# Altium PCB v0.0.PcbDoc
Units mil, origin at the board's own origin, x right, y up, seen from the top; angles counter-clockwise.
Board outline 1136.52 x 984.25 mil, 4 copper layers (Top Layer, Gnd, Signal, Bottom Layer), stack 23.756 mil thick; 32 components, 25 nets, 108 pads, 35 vias.
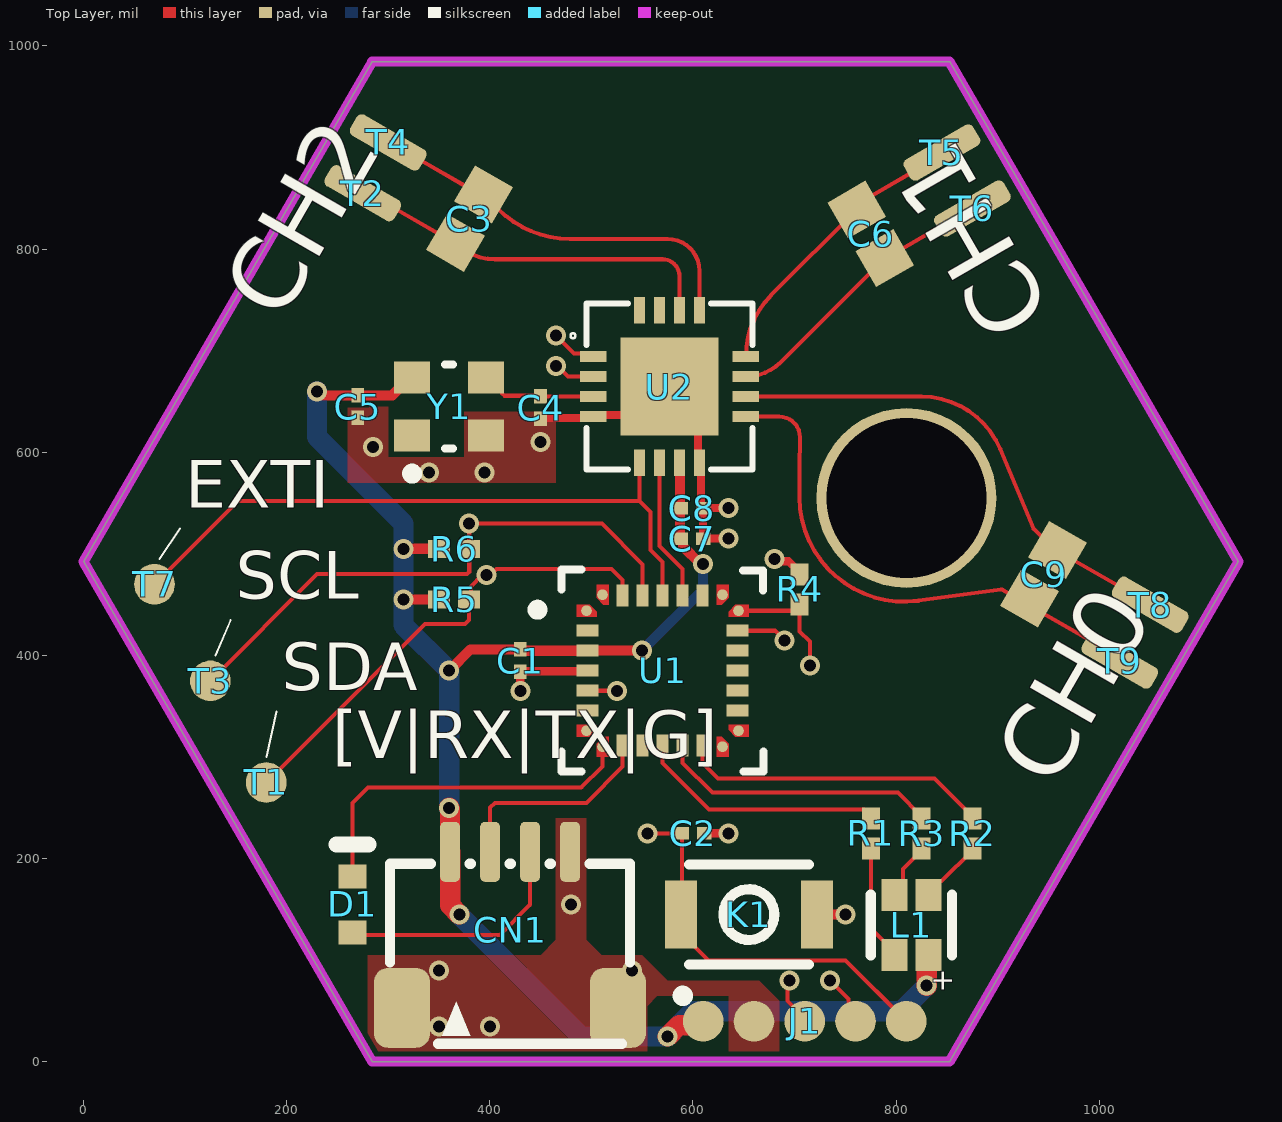
[diagram p0: Top Layer view]
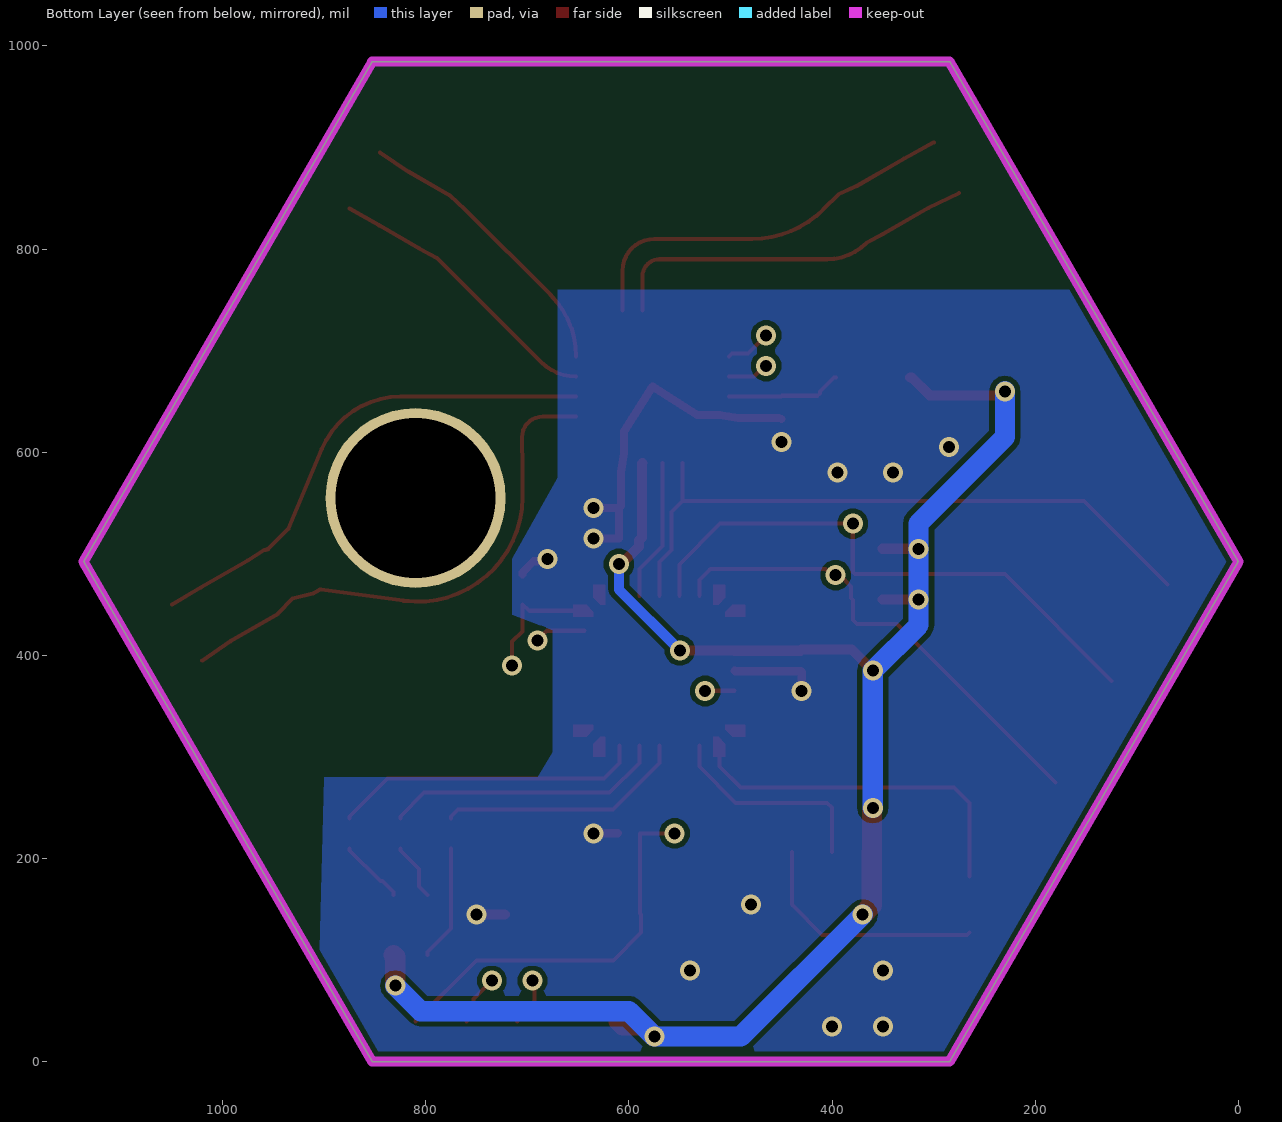
[diagram p1: Bottom Layer view, seen from below]
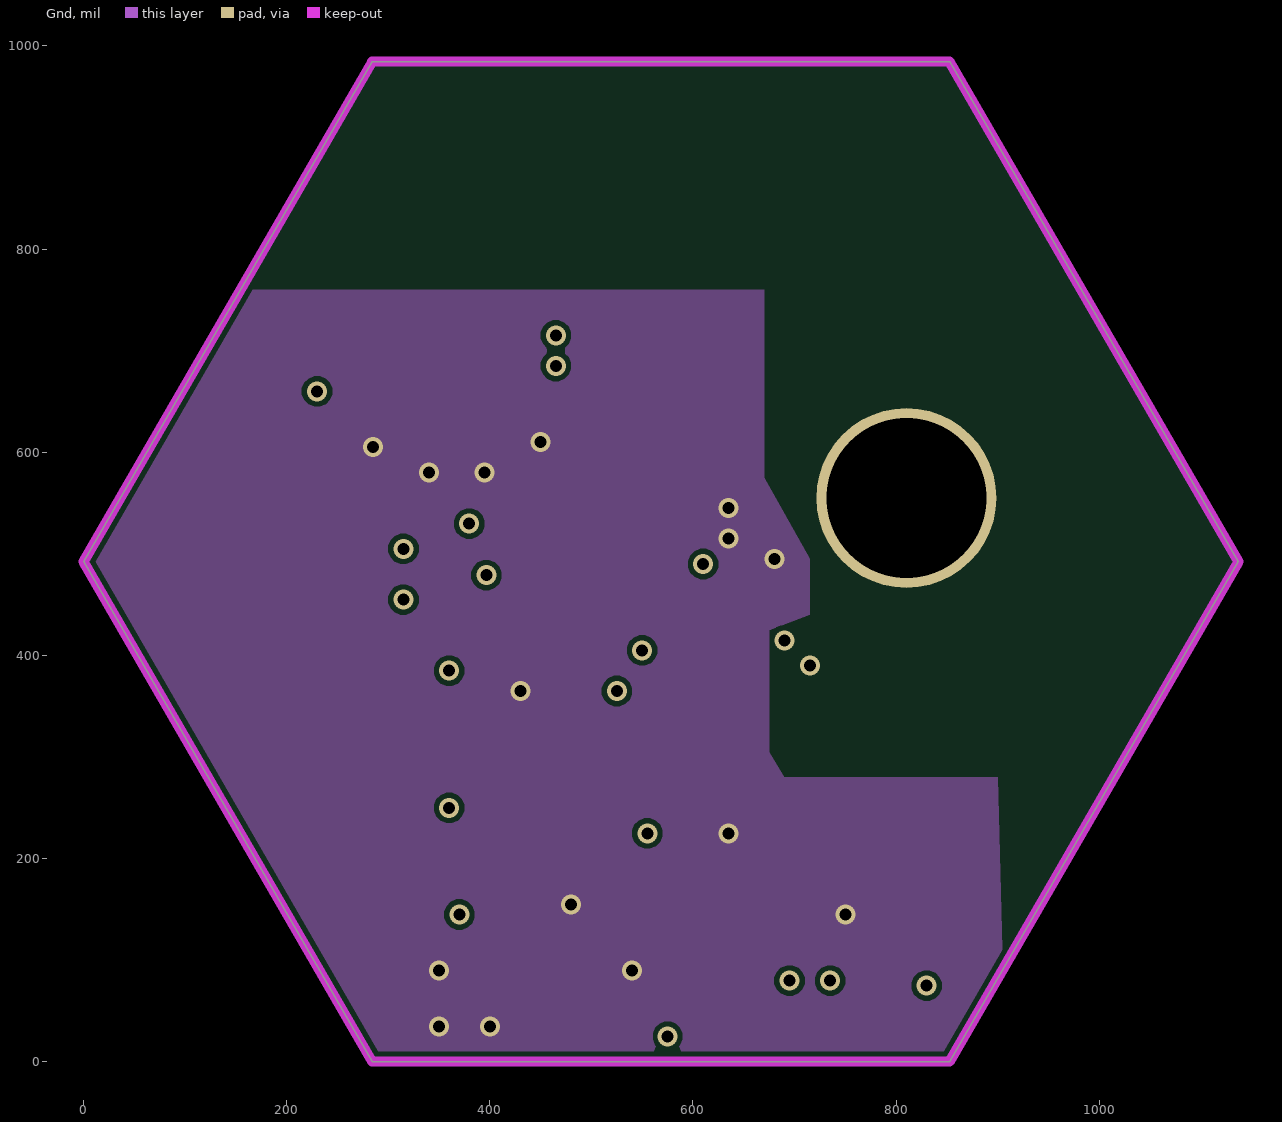
[diagram p2: Gnd]
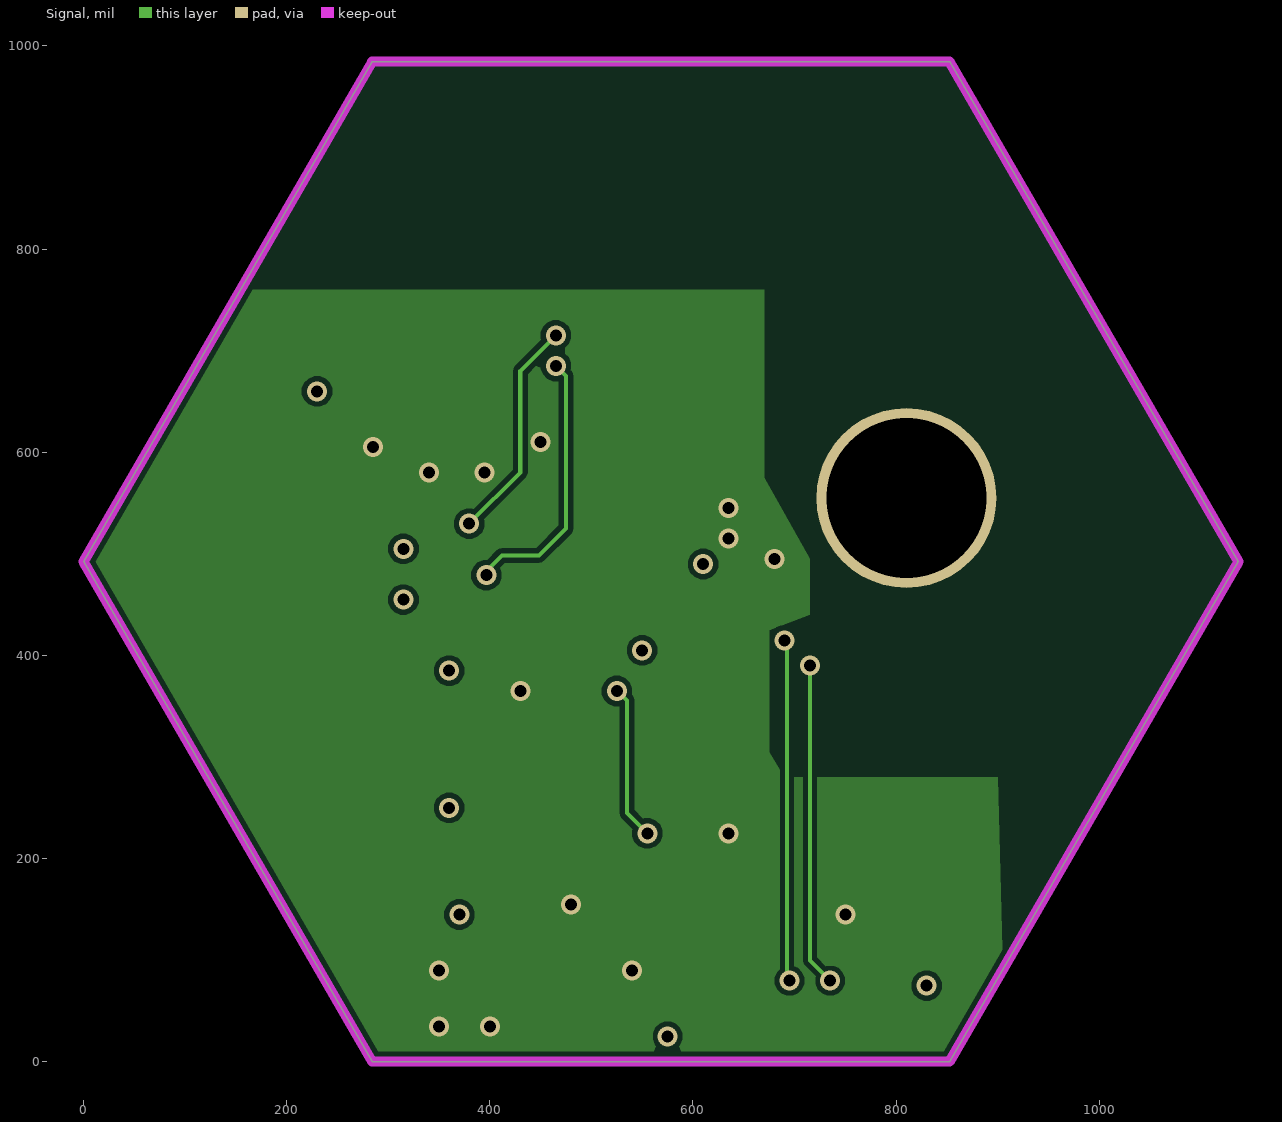
[diagram p3: Signal]

## Layer stack, top to bottom
Top Solder: solder mask 0.4, Solder Resist, Dk 3.5
Top Layer: signal copper 1.4
Dielectric 2: prepreg 2.8, PP-006, Dk 4.1
Gnd: signal copper 1.378
Dielectric 1: dielectric 12.6, FR-4, Dk 4.8
Signal: signal copper 1.378
Dielectric 3: prepreg 2.8, PP-006, Dk 4.1
Bottom Layer: signal copper 1.4
Bottom Solder: solder mask 0.4, Solder Resist, Dk 3.5

## Board outline
284.38,0.25 0.25,492.38 284.38,984.5 852.64,984.5 1136.77,492.38 852.64,0.25

## Design rules (kind name [scope] priority, off if disabled: settings)
Clearance [All] p1: gap=5 ignorepadtopadclearanceinfootprint=FALSE
PlaneConnect [All] p1: planeconnectstyle=Direct reliefexpansion=20 reliefentries=4 reliefconductorwidth=10 reliefairgap=10
PolygonConnect [All] p1: connectstyle=Direct reliefconductorwidth=10 reliefentries=4 polygonreliefangle="90 Angle" airgapwidth=10
RoutingVias [All] p1: holewidth=11.81 width=19.68 viastyle="Through Hole" minholewidth=11.81 minwidth=19.68 maxholewidth=11.81 maxwidth=19.68
SolderMaskExpansion [All] p1: expansion=4 istentingtop=FALSE
Width [All] p1: maxlimit=25 minlimit=4 preferedwidth=4
29 further rules are at their usual default settings.

## Components (designator, comment, footprint, x,y, rotation, side; value= is the part's Value field where it differs from the comment)
C1 "100nF" CAPC0201(0603)33_L 430,395 r270 top value=10nF
C2 "100nF" CAPC0201(0603)33_L 600,225 r0 top value=10nF
C3 "330pF" CAPC1608X95X40ML15T15 380,830 r240 top
C4 "15pF" CAPC0201(0603)33_L 450,643.98 r90 top value=10nF
C5 "100nF" CAPC0201(0603)33_L 270,645 r90 top value=10nF
C6 "330pF" CAPC1608X95X40ML15T15 775,815 r120 top
C7 "100nF" CAPC0201(0603)33_L 598.98,515 r0 top value=10nF
C8 "10nF" CAPC0201(0603)33_L 598.98,545 r0 top
C9 "330pF" CAPC1608X95X40ML15T15 945,480 r60 top
CN1 "UART-IN" CONN-SMD_4P-P1.00_WF10004-01200 420,130 r0 top
D1 "RB521S-30" DIOD-SOD523-2_V 265,155 r90 top
J1 "DEBUG-SWD-HEADER" DEBUG-SWD-HEADER-Footprint-1 610,40 r0 top
K1 "Button" SW-SMD_ST-1185X 655,145 r0 top
L1 "RGB-LED-1615" RGB-LED-1615-Footprint-1 815,135 r270 top
R1 "500R" RESC0603X26X15ML03T05 775,225 r90 top
R2 "500R" RESC0603X26X15ML03T05 875,225 r90 top
R3 "500R" RESC0603X26X15ML03T05 825,225 r90 top
R4 "10K" RESC0603X26X15ML03T05 705,465 r270 top
R5 "4.7K" RESC0603X26X15ML03T05 365,455 r0 top
R6 "4.7K" RESC0603X26X15ML03T05 365,505 r0 top
T1 "TP" TestPoint 180,275 r0 top
T2 "TP" TESTPOINT-RECTANGLE-1.5X3#1 275,855 r60 top
T3 "TP" TestPoint 125,375 r0 top
T4 "TP" TESTPOINT-RECTANGLE-1.5X3#1 300,905 r60 top
T5 "TP" TESTPOINT-RECTANGLE-1.5X3#2 845,895 r270 top
T6 "TP" TESTPOINT-RECTANGLE-1.5X3#3 875,840 r180 top
T7 "TP" TestPoint 70,470 r0 top
T8 "TP" TESTPOINT-RECTANGLE-1.5X3#4 1050,450 r0 top
T9 "TP" TESTPOINT-RECTANGLE-1.5X3#4 1020,395 r0 top
U1 "STM32G031G8U6" FP-UFQFPN28-A0B0-MFG 570,385 r0 top
U2 "LDC1614RGHR" LDC1614RGHR-Footprint-1 576.88,664.73 r0 top
Y1 "OT252040MJBA4SL" FP-ECS-TXO-2520-MFG 360,645 r0 top

## Footprints (in the part's own frame and the unit in brackets; to place one, negate y for a bottom-side part, rotate by r counter-clockwise, add the part's x,y. Pads: shape width x height; smd on the part's side, far side on the other; paste and mask are expansions set on the pad)
CAPC0201(0603)33_L [mm] "Chip Capacitor, Body 0.6x0.3mm, Height 0.33mm, IPC High Density"
  rect 0.36x0.32 smd: 1(-0.28,0) 2(0.28,0)
  body extent -0.32,-0.17 0.32,0.17, height 0.33
CAPC1608X95X40ML15T15 [mm] "Chip Capacitor, 2-Leads, Body 1.60x0.80mm, IPC Low Density"
  rect 1.05x1.1 smd: 1(-0.7,0) 2(0.7,0)
  body extent -0.88,-0.48 0.87,0.47, height 0.95
CONN-SMD_4P-P1.00_WF10004-01200 [mm]
  rrect50% 0.5x1.5 smd mask+0.051: 1(-1.5,1.95) 2(-0.5,1.95) 3(0.5,1.95) 4(1.5,1.95)
  rrect50% 1.4x2 smd mask+0.051: 5(2.7,-1.95) 6(-2.7,-1.95)
  silkscreen extent -3,-2.85 3,1.65, body extent -2.95,-2.98 3.05,1.97, height 2.9
DEBUG-SWD-HEADER-Footprint-1 [mil]
  round 40 smd: 1(0,0) 2(50,0) 3(100,0) 4(150,0) 5(200,0)
  silkscreen extent -25,20 -15,30
DIOD-SOD523-2_V [mm] "SOD523, 2-Leads, Body 1.2x0.8mm"
  rect 0.6x0.7 smd: 1(-0.7,0) 2(0.7,0)
  silkscreen extent 1.5,-0.4 1.5,0.4, body extent -0.8,-0.4 0.8,0.4, height 0.65
FP-ECS-TXO-2520-MFG [mm]
  rect 0.9x0.8 smd paste+0 mask+0: 1(-0.925,-0.725) 2(0.925,-0.725) 3(0.925,0.725) 4(-0.925,0.725)
  silkscreen extent -1.05,-1.8 0.1,1.05, body extent -1.48,-1.22 1.48,1.22, height 0.25
FP-UFQFPN28-A0B0-MFG [mm]
  round 0.27 smd paste+0 mask+0: 1(-1.9,1.5) 7(-1.9,-1.5) 8(-1.5,-1.9) 14(1.5,-1.9) 15(1.9,-1.5) 21(1.9,1.5) 22(1.5,1.9) 28(-1.5,1.9)
  rect 0.55x0.3 smd paste+0 mask+0: 2(-1.875,1) 3(-1.875,0.5) 4(-1.875,0) 5(-1.875,-0.5) 6(-1.875,-1) 16(1.875,-1) 17(1.875,-0.5) 18(1.875,0) 19(1.875,0.5) 20(1.875,1)
  rect 0.3x0.55 smd paste+0 mask+0: 9(-1,-1.875) 10(-0.5,-1.875) 11(0,-1.875) 12(0.5,-1.875) 13(1,-1.875) 23(1,1.875) 24(0.5,1.875) 25(0,1.875) 26(-0.5,1.875) 27(-1,1.875)
  Top Layer region: -1.35,1.65 -1.48,1.65 -1.65,1.82 -1.65,2.15 -1.35,2.15 -1.35,1.65
  Top Layer region: 1.35,1.65 1.48,1.65 1.65,1.82 1.65,2.15 1.35,2.15 1.35,1.65
  Top Layer region: 1.35,-1.65 1.48,-1.65 1.65,-1.82 1.65,-2.15 1.35,-2.15 1.35,-1.65
  Top Layer region: -1.35,-1.65 -1.48,-1.65 -1.65,-1.82 -1.65,-2.15 -1.35,-2.15 -1.35,-1.65
  Top Layer region: -1.65,1.35 -1.65,1.48 -1.82,1.65 -2.15,1.65 -2.15,1.35 -1.65,1.35
  Top Layer region: 1.65,1.35 1.65,1.48 1.82,1.65 2.15,1.65 2.15,1.35 1.65,1.35
  Top Layer region: 1.65,-1.35 1.65,-1.48 1.82,-1.65 2.15,-1.65 2.15,-1.35 1.65,-1.35
  Top Layer region: -1.65,-1.35 -1.65,-1.48 -1.82,-1.65 -2.15,-1.65 -2.15,-1.35 -1.65,-1.35
  silkscreen extent -3.25,-2.52 2.52,2.53, body extent -2.25,-2.25 2.25,2.25, height 0.25
LDC1614RGHR-Footprint-1 [mm]
  rect 0.665x0.28 smd paste+0 mask+0.051: 1(-1.908,0.75) 2(-1.908,0.25) 3(-1.908,-0.25) 4(-1.908,-0.75) 9(1.908,-0.75) 10(1.908,-0.25) 11(1.908,0.25) 12(1.908,0.75)
  rect 0.28x0.665 smd paste+0 mask+0.051: 5(-0.75,-1.908) 6(-0.25,-1.908) 7(0.25,-1.908) 8(0.75,-1.908) 13(0.75,1.908) 14(0.25,1.908) 15(-0.25,1.908) 16(-0.75,1.908)
  rect 2.45x2.45 smd paste+0 mask+0.051: 17(0,0)
  silkscreen extent -2.47,-2.08 2.08,2.08, body extent -1.97,-1.97 2.03,2.03, height 0.8
RESC0603X26X15ML03T05 [mm] "Chip Resistor, 2-Leads, Body 0.60x0.30mm, IPC Low Density"
  rect 0.55x0.45 smd: 1(-0.375,0) 2(0.375,0)
  body extent -0.32,-0.16 0.32,0.17, height 0.26
RGB-LED-1615-Footprint-1 [mm]
  rect 0.8x0.65 smd paste+0 mask+0.05: 1(0.757,-0.425) 2(0.757,0.425) 3(-0.743,0.425) 4(-0.743,-0.425)
  silkscreen extent -0.75,-1.02 0.77,1.02, body extent -0.8,-0.8 0.8,0.8, height 0.35
SW-SMD_ST-1185X [mm]
  rect 0.8x1.7 smd paste+0 mask+0.051: 1(-1.7,0) 2(1.7,0)
  silkscreen extent -1.5,-1.25 1.5,1.25, body extent -2,-1.25 2,1.25, height 1.6
TestPoint [mil]
  round 40 smd: 1(0,0)
TESTPOINT-RECTANGLE-1.5X3#1 [mm]
  rrect50% 0.6x2 smd: 1(0,0)
TESTPOINT-RECTANGLE-1.5X3#2 [mm]
  rrect50% 0.6x2 smd rot 30: 1(0,0)
TESTPOINT-RECTANGLE-1.5X3#3 [mm]
  rrect50% 0.6x2 smd rot 120: 1(0,0)
TESTPOINT-RECTANGLE-1.5X3#4 [mm]
  rrect50% 0.6x2 smd rot 60: 1(0,0)

## Part data
C1 C2 C4 C5 C7 C8: library part CMP-1033-00642-1, "CAP 10nF 16V ±10% 0201 (0603 Metric) Thickness 0.33mm SMD", Case-EIA=0201, Case-Metric=0603, Rated Voltage="16 V", Tolerance=Â±10%, Max Thickness="0.33 mm", Technology=SMT
C3 C6 C9: library part CMP-2006-00057-1, Manufacturer=Vitramon, Part Number=VJ0603Y104KXXCW1BC
CN1: library part SH1.0-4P, "连接器", Current Rating (Max)=500mA, JLCPCB Part Class="Extended Part", LCSC Part Name="1mm 1x4P 卧贴", Manufacturer=ATOM(爱特姆), Manufacturer Part=WF10004-01200, Operating Temperature Range=-25℃~+85℃, Add into BOM=yes, Convert to PCB=yes, Datasheet=https://atta.szlcsc.com/upload/public/pdf/source/20200107/C479990_7EE1728C707014A64676B41D860FB4D7.pdf, Device=WF10004-01200, Gender=公型插针, Mounting Style=卧贴, Name=WF10004-01200, Number of PINs Per Row=4, Number of Rows=1, Pins Structure=1x4P, Pitch=1mm, Reference Series=-, Row Spacing=-, Supplier=LCSC, Supplier Footprint=SMD,P=1mm, Supplier Part=C479990, Symbol=WF10004-01200
D1: library part CMP-2000-05518-2, "Surface Mount Fast Switching Diode, -65 to 150 degC, 2-Pin SOD523, RoHS, Tape and Reel", Forward Current=250mA, Manufacturer="Diodes Inc", Package Description="2-Pin Small Outline Diode, Body 1.2 x 0.8 mm", Package Reference=SOD523-2, Package Type=SOD-523, PartNumber=1N4148WT, Datasheet URL=http://www.diodes.com/_files/datasheets/ds30396.pdf, Datasheet Version="Rev. 16-2, 11/2015", Diode Configuration=Single, Manufacturer URL=http://www.diodes.com/, Mounting Technology=SurfaceMount, Mounting Type=SurfaceMount, Number of Elements per Chip=1, Package URL=http://www.diodes.com/_files/packages/SOD523.pdf, Pin Count=2
J1: library part CMP-002-00074-1, "1.27MM 5P 测试/调试/下载焊点"
L1: library part CMP-007-00036-2, "RGB LED"
R1 R2 R3 R4 R5 R6: library part CMP-2004-01563-1, Manufacturer="KOA Speer", Part Number=RK73H1HTTC1002F
T1 T2 T3 T4 T5 T6 T7 T8 T9: library part TestPoint, "TestPoint"
U1: library part CMP-031-00013-1, "MCU 32-Bit ARM Cortex-M0+ RISC 64KB Flash 1.7V to 3.6V 28-Pin UFQFPN Tray", Case/Package=UFQFPN, Max Operating Temperature=85°C, Min Operating Temperature=-40°C, Mounting Technology="Surface Mount", Pins=28
U2: library part CMP-031-00006-3, "4-Ch, 28-bit, high-resolution Inductance to digital converter 16-WQFN -40 to 125", Max Operating Temperature=125°C, Min Operating Temperature=-40°C, Mounting Technology="Surface Mount", Pins=16, RoHS Compliant=Yes
Y1: library part CMP-40224-000034-1, "XTAL OSC TCXO 25.0000MHZ HCMOS", RoHS Compliant=Yes

## Free pads (board coordinates)
  round 177.17 hole 157.48: 1(810,555)

## Via types
v1: diameter 19.68, hole 11.81, Top Layer to Bottom Layer, tented both sides, 35 vias

## Nets (pads, with @x,y where several pads share a name; then routed paths per layer and width w, separated by ;. In a path a pad name is that pad's centre, name@x,y a point inside that pad or via, vN(x,y) a via of type N, cw(c..) or ccw(c..) an arc to the next point about the centre after c; other vN are vias at no path point)
3V3: C1.1 C5.2 C7.1 C8.1 CN1.1 J1.1 L1.2 R5.1 R6.1 U1.3 U2.7 Y1.4 | length 1769
  Top Layer w10: v1(230,660) 232.62,660 236.6,656.02 C5.2 304.09,656.02 321.61,673.54 Y1.4 ; v1(315,455) R5.1 ; v1(315,505) R6.1 ; v1(360,385) 381.02,406.02 C1.1 431.3,404.69 U1.3 496.34,404.84 549.84,404.84 v1(550,405) ; U2.7 587.23,589.11 587.23,515.72 588.02,515.72 590.04,513.7 590.04,507.43 607.47,490 v1(610,490)
  Top Layer w20: v1(360,250) 360.79,249.21 360.79,206.93 CN1.1 360.94,154.06 v1(370,145) ; v1(575,25) 586.17,36.17 606.17,36.17 J1.1 ; v1(830,75) 830,103.46 L1.2
  Bottom Layer w10: v1(550,405) 610,465 v1(610,490)
  Bottom Layer w20: v1(230,660) 230,615 315,530 315,430 v1(360,385) v1(360,250) ; v1(370,145) 490,25 v1(575,25) 600,50 805,50 v1(830,75)
CH0-A: C9.1 T9.1 U2.9 | length 519.7
  Top Layer w4: U2.9 684.8,635.2 cw(c684.8,614.64) 705.36,614.8 cw(c701.36,614.77) 705.36,614.74 704.8,583.7 704.8,555.23 ccw(c808.01,556.19) 821.8,453.9 cw(c822.38,449.94) 821.87,453.91 903.03,464.83 904.37,464.83 905.3,464.3 911.25,460.86 C9.1 945.3,441.21 992.35,414.04 T9.1
CH0-B: C9.2 T8.1 U2.10 | length 494.4
  Top Layer w4: U2.10 824.89,654.89 cw(c824.46,570.37) 902.4,603.07 935.4,524.6 935.96,524.04 954.26,505.74 ccw(c958.78,510.26) C9.2 975.44,493.42 1021.18,467.02 T8.1
CH1-A: C6.1 T6.1 U2.11 | length 282.1
  Top Layer w4: U2.11 ccw(c651.98,723.42) 686.52,688.88 C6.1 806.06,800.51 845.89,823.5 T6.1
CH1-B: C6.2 T5.1 U2.12 | length 287.4
  Top Layer w4: U2.12 cw(c737.36,694.26) 676.98,754.63 C6.2 776,852.58 817.14,876.33 T5.1
CH2-A: C3.1 T4.1 U2.13 | length 390.1
  Top Layer w4: T4.1 329.39,888.97 375.86,862.14 C3.1 408.36,839.29 ccw(c479.07,910) 479.07,810 575,810 cw(c575,778.59) 606.41,778.59 U2.13
CH2-B: C3.2 T2.1 U2.14 | length 371.4
  Top Layer w4: T2.1 305.31,840.58 348.89,815.42 C3.2 ccw(c405.17,845.08) 405.17,790 570,790 cw(c570,773.28) 586.72,773.28 U2.14
EXTI_INTB/PB5: T7.1 U1.25 U2.5 | length 651.5
  Top Layer w4: T7.1 152.11,552.11 547.35,552.11 ; U2.5 547.35,552.11 ; U1.25 570,491.94 558.04,503.9 558.04,541.42 547.35,552.11
GND: C1.2 C2.2 C4.1 C5.1 C7.2 C8.2 CN1.4 CN1.5 CN1.6 J1.2 K1.2 R4.1 U1.4 U2.4 U2.8 U2.17 Y1.2 | length 514.4
  Top Layer w8: v1(430,365) C1.2 430.51,384.49 495.67,384.49 U1.4 ; C4.1 452.3,633.68 492.69,633.68 U2.4 510.87,636.71 532.65,636.71 U2.17 604.89,620.5 604.89,598.72 U2.8 607.92,580.54 607.92,547.3 C8.2 ; C2.2 v1(635,225) ; v1(635,515) C7.2 C8.2 ; v1(635,545) C8.2 ; v1(680,495) 682.24,492.76 693.97,492.76 705,481.73 R4.1
  Top Layer w10: K1.2 v1(750,145)
  other v1: 350,35 400,35 350,90 540,90 480,155 340,580 395,580 285,605 450,610
LDC_SCL/PB6: R6.2 T3.1 U1.26 U2.1 | length 830.6
  Top Layer w4: T3.1 230,480 377.42,480 379.76,482.34 R6.2 v1(379.76,529.76) 510.24,529.76 550.31,489.69 U1.26 ; v1(465,715) 482.69,697.31 498.72,697.31 U2.1
  Signal w4: v1(379.76,529.76) 430,580 430,680 v1(465,715)
LDC_SD/PB4: U1.24 U2.6 | length 140.2
  Top Layer w4: U2.6 567.04,507.63 589.68,484.98 U1.24
LDC_SDA/PB7: R5.2 T1.1 U1.27 U2.2 | length 776.7
  Top Layer w4: T1.1 336.19,431.19 375.59,431.19 379.34,434.94 379.34,454.57 381.31,456.54 381.31,467.93 v1@392.51,479.13 ; v1(396.58,479.13) 400.83,479.13 406.7,485 520,485 530.63,474.37 U1.27 ; v1(465,685) 466.54,685 476.97,674.57 U2.2
  Signal w4: v1(396.58,479.13) 396.58,483.21 411.94,498.57 448.57,498.57 475,525 475,675 v1(465,685)
LED_B: R3.2 U1.12 | length 275.9
  Top Layer w4: U1.12 589.69,294.35 619.04,265 801.73,265 825,241.73 R3.2
LED_G: R2.2 U1.13 | length 306.2
  Top Layer w4: U1.13 609.37,294.35 624.72,279 837.73,279 875,241.73 R2.2
LED_R: R1.2 U1.11 | length 245.6
  Top Layer w4: U1.11 570,294.35 615.76,248.59 768.14,248.59 775,241.73 R1.2
LPUART_RX/PA3: CN1.2 U1.9 | length 211.1
  Top Layer w4: CN1.2 400.31,250.31 405,255 495,255 530.63,290.63 U1.9
LPUART_TX/PA2: CN1.3 D1.1 | length 240.1
  Top Layer w4: D1.1 267.44,125 410,125 439.69,154.69 CN1.3
NetC4_2: C4.2 U2.3 Y1.3 | length 114.1
  Top Layer w4: Y1.3 398.39,673.54 412.13,659.8 412.13,658.02 414.48,655.67 449.33,655.67 450.11,654.89 U2.3
NetD1_2: D1.2 U1.8 | length 352.5
  Top Layer w4: D1.2 265,255 280,270 490,270 510.94,290.94 U1.8
NetL1_1: L1.1 R1.1 | length 114.7
  Top Layer w4: R1.1 775,131.41 798.27,108.14 L1.1
NetL1_3: L1.3 R2.1 | length 65.2
  Top Layer w4: L1.3 831.73,167.2 842.52,178 844.73,178 875,208.27 R2.1
NetL1_4: L1.4 R3.1 | length 57.1
  Top Layer w4: L1.4 806.73,172.72 806.73,190 825,208.27 R3.1
RST: C2.1 J1.5 K1.1 U1.5 | length 572.1
  Top Layer w4: U1.5 524.69,365.31 v1(525,365) ; v1(555,225) C2.1 588.98,145.9 K1.1 588.08,127.28 615.36,100 750,100 J1.5
  Signal w4: v1(525,365) 525.91,365 535,355.91 535,245 v1(555,225)
SWCLK: J1.4 R4.2 U1.21 | length 495.6
  Top Layer w4: U1.21 698.14,444.06 R4.2 705,423.82 715,413.82 v1(715,390) ; v1(735,80) 753.12,61.88 753.12,46.88 J1.4
  Signal w4: v1(715,390) 715,100 v1(735,80)
SWDIO: J1.3 U1.20 | length 435
  Top Layer w4: U1.20 680.63,424.37 v1(690,415) ; v1(695,80) 693,78 693,59.77 710,42.77 J1.3
  Signal w4: v1@692.5,82.5 v1@692.5,412.5
  Bottom Layer w4: v1(690,415) v1@692.5,412.5 ; v1@692.5,82.5 v1(695,80)
pads on no net: U1.1 U1.2 U1.6 U1.7 U1.10 U1.14 U1.15 U1.16 U1.17 U1.18 U1.19 U1.22 U1.23 U1.28 U2.15 U2.16 Y1.1

## Polygon pours and split planes (outlines as drawn)
GND on Gnd "NONET_L01_P-001" (solid, remove dead copper, pour order 6): 855,0 285,0 0,495 155,760 670,760 670,575 715,495 715,440 675,425 675,305 690,280 900,280 905,90
GND on Top Layer "NONET_L01_P-001" (solid, pour order 3): 280,105 450,105 465,120 465,240 495,240 495,120 510,105 550,105 575,80 665,80 685,60 685,0 640,0 635,5 635,65 565,65 555,55 555,0 280,0
GND on Top Layer "NONET_L01_P-001" (solid, pour order 2): 260,645 260,570 465,570 465,640 375,640 375,595 300,595 300,645
GND on Bottom Layer "NONET_L01_P-001" (solid, remove dead copper, pour order 0): 855,0 285,0 0,495 155,760 670,760 670,575 715,495 715,440 675,425 675,305 690,280 900,280 905,90
GND on Signal "NONET_L01_P-001" (solid, remove dead copper, pour order 5): 855,0 285,0 0,495 155,760 670,760 670,575 715,495 715,440 675,425 675,305 690,280 900,280 905,90

## Keep-outs
Keep-Out Layer:
  the board outline again, w10

## Silkscreen, mask and mechanical layers (free items; w line width, h text height)
Top Overlay:
  lines w2: 75,495 95,525 ; 130,400 145,435 ; 180,300 190,345
  text "CH1" at 974.28,749.58 h120 r120
  text "CH2" at 214.28,715.42 h120 r60
  text "EXTI" at 100.06,530 h80
  text "SCL" at 150.06,440.56 h80
  text "SDA" at 195.06,350.56 h80
  text "[V|RX|TX|G]" at 245,283.66 h80
  text "CH0" at 974.13,255.5 h120 r60
Mechanical 1:
  lines w0.5: 0.25,492.38 284.38,0.25 852.64,0.25 1136.77,492.38 852.64,984.5 284.38,984.5 0.25,492.38
  lines w10: 810,495 1136.77,492.38 ; 810,555 815,0

## Text inside footprints (layer, text, board x,y; h text height)
L1: Top Overlay "+" at 855.28,68.15 h20.59 r90